# Altium PCB PCB.PcbDoc (part 2 of 2)
Units mm, origin at the board's own origin, x right, y up, seen from the top; angles counter-clockwise.
Board outline 40 x 40 mm, 4 copper layers (Top Layer, Layer 1, Layer 2, Bottom Layer), stack 1.587 mm thick; 76 components, 59 nets, 257 pads, 289 vias.
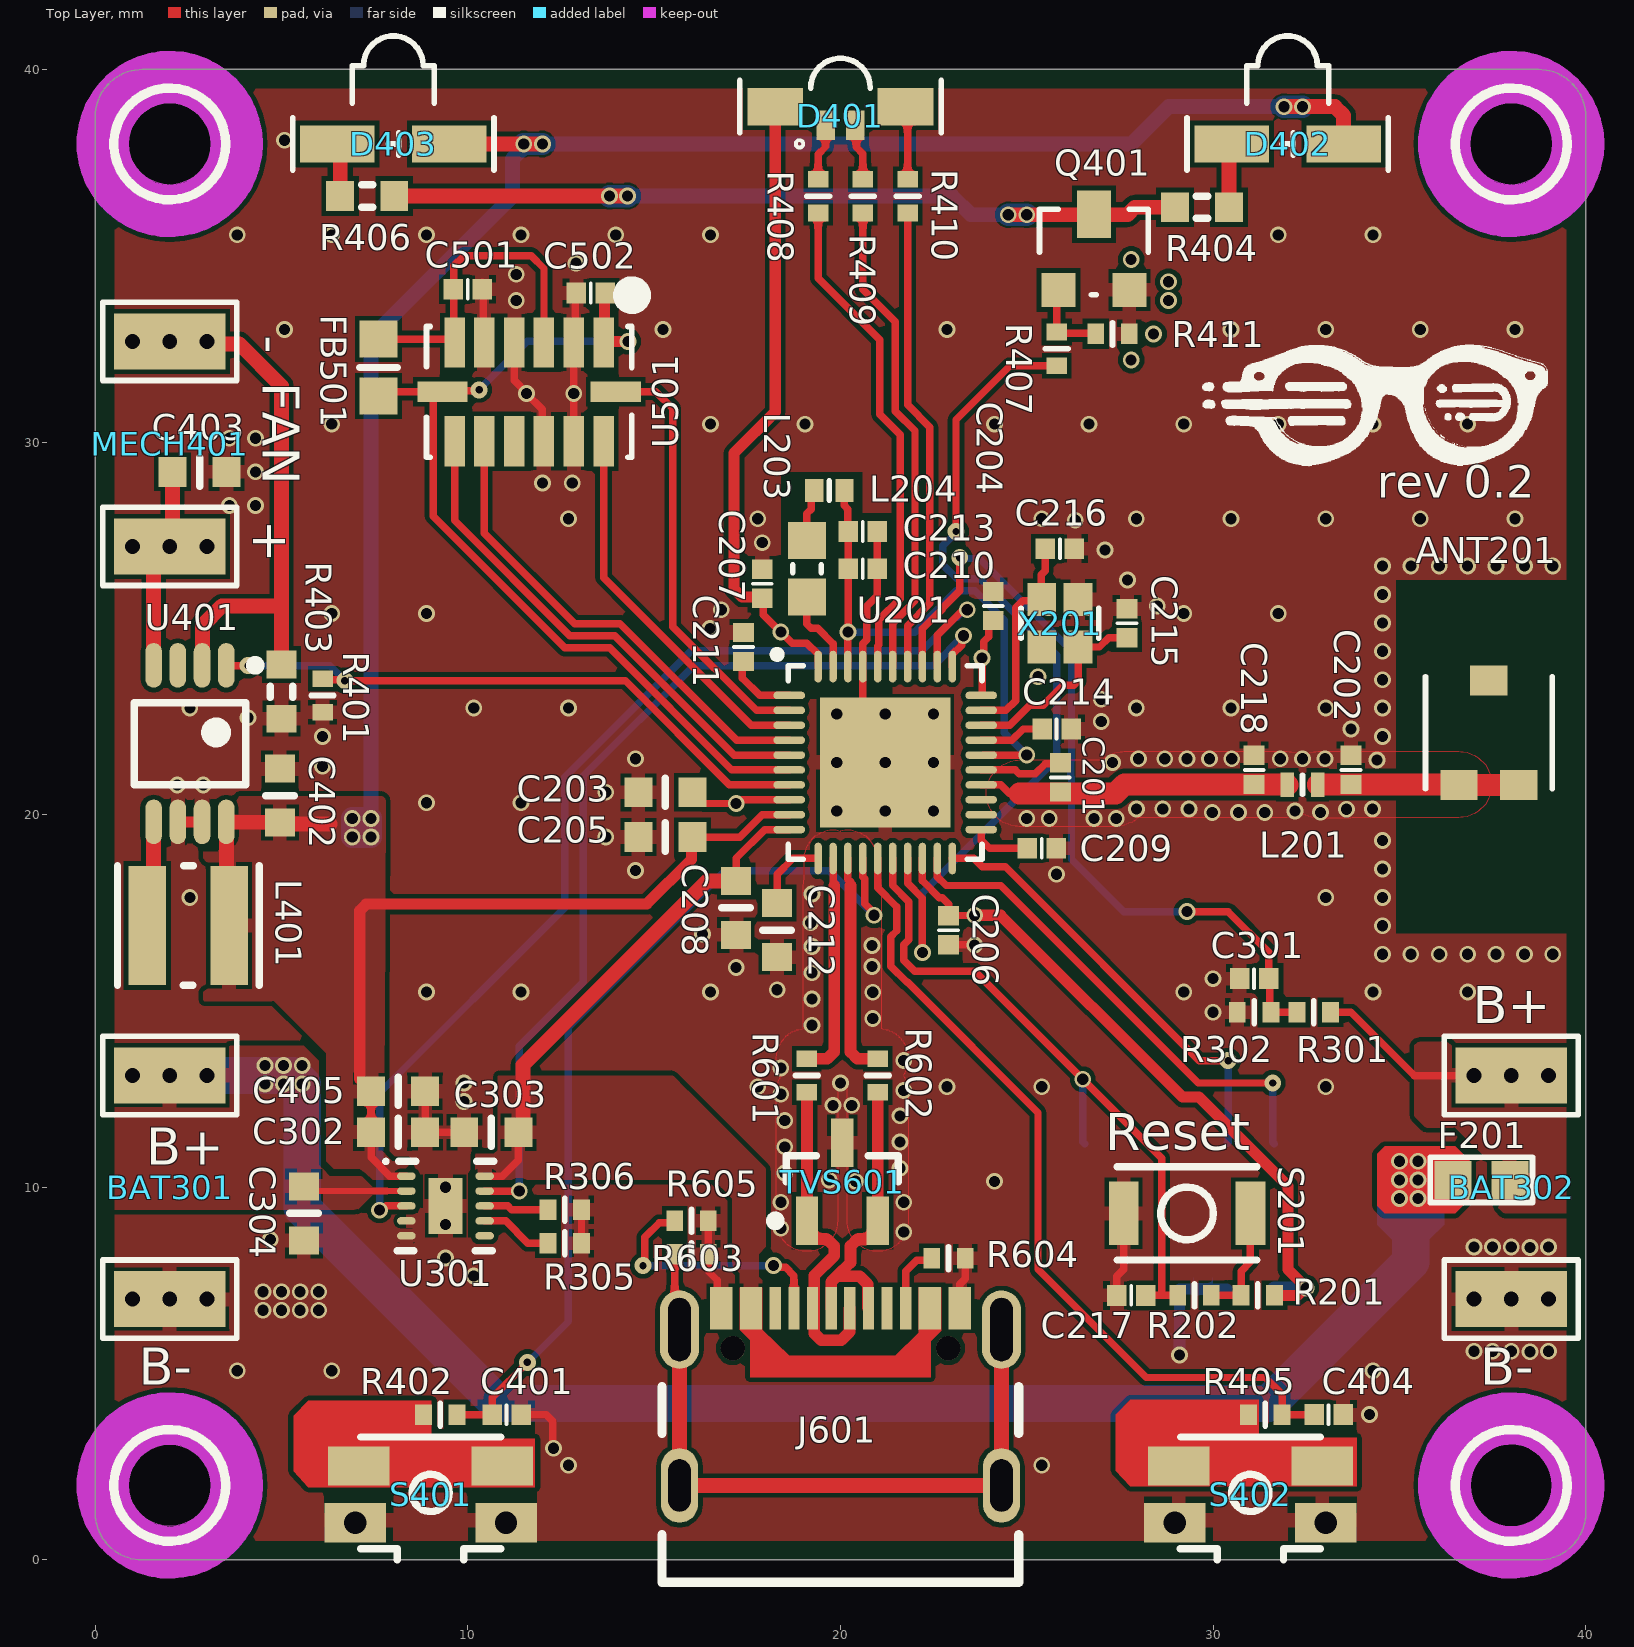
[diagram p0: Top Layer view]

## Via types
v1: diameter 0.45, hole 0.3, Top Layer to Bottom Layer, tented both sides, 133 vias
v2: diameter 0.45, hole 0.3, Top Layer to Bottom Layer, 120 vias
v3: diameter 0.7, hole 0.4, Top Layer to Bottom Layer, tented both sides, 18 vias
v4: diameter 0.45, hole 0.2, Top Layer to Bottom Layer, tented both sides, 9 vias
v5: diameter 0.635, hole 0.3, Top Layer to Bottom Layer, 9 vias

## Nets (pads, with @x,y where several pads share a name; then routed paths per layer and width w, separated by ;. In a path a pad name is that pad's centre, name@x,y a point inside that pad or via, vN(x,y) a via of type N, cw(c..) or ccw(c..) an arc to the next point about the centre after c; other vN are vias at no path point) (continued)
NetC209_1: C209.1 U201.21 | length 1.6
  Top Layer w0.2: U201.21 23.783,19.6 23.783,19.317 24,19.1 C209.1
NetC210_1: C210.1 C213.1 L204.2 U201.26 U201.38 | length 14.9
  Top Layer w0.2: L204.2@20.158,28.647 L204.2 20.1,28.695 20.1,28.3 20.2,28.2 20.2,27.695 20.158,27.652 C213.1 C210.1 20.205,26.595 20.205,24.905 v1(20.2,24.9) U201.38 ; U201.26@23.832,21.6 v1(25,21.6)
  Bottom Layer w0.2: v1(20.2,24.9) 21.996,24.9 23.1,26.004 23.609,26.004 24.4,25.213 24.4,22.2 v1(25,21.6)
NetC211_1: C211.1 U201.1 | length 1.9
  Top Layer w0.2: C211.1 17.361,24.071 17.361,23.667 17.829,23.2 U201.1
NetC212_1: C212.1 U201.11 | length 2.1
  Top Layer w0.2: C212.1 18.3,18.4 18.725,18.825 U201.11
NetC214_1: C214.1 U201.27 | length 1.8
  Top Layer w0.2: U201.27 24.6,22 24.9,22.3 C214.1
NetC215_1: C215.1 U201.28 X201.3 | length 5.4
  Top Layer w0.2: U201.28 24.538,22.4 25.075,22.938 25.438,22.938 25.975,23.475 26.258,23.475 26.375,23.592 X201.3 26.95,24.5 27.197,24.747 C215.1
NetC216_1: C216.1 U201.29 X201.1 | length 5.7
  Top Layer w0.2: U201.29 24.438,22.8 24.7,23.062 24.7,25.55 24.887,25.737 25.362,25.737 X201.1 25.387,25.787 25.387,26.437 25.498,26.548 C216.1
NetC301_1: C301.1 R301.1 R302.2 U201.33 | length 21.6
  Top Layer w0.2: U201.33 22.2,24.989 22.727,25.516 22.727,25.54 23.2,26.013 v4(23.2,26.9) ; v1(29.3,17.4) 30.4,17.4 31.49,16.31 C301.1 31.52,15.57 31.52,14.73 R302.2 R301.1
  Bottom Layer w0.2: v4(23.2,26.9) 23.225,26.875 23.725,26.875 26.2,24.4 26.2,21.459 26.183,21.442 26.183,21.025 26.2,21.008 26.2,18.8 27.6,17.4 v1(29.3,17.4)
NetC401_1: C401.1 R402.1 U201.14 | length 24.3
  Top Layer w0.2: R402.1 C401.1 10.66,3.908 10.66,4.36 v4(11.6,5.3) ; U201.14 20.6,18.334 20.653,18.281 20.653,17.614 20.9,17.368 v1(20.9,17.3)
  Bottom Layer w0.2: v4(11.6,5.3) 12.7,6.4 12.7,14.3 16.9,18.5 19.7,18.5 v1(20.9,17.3)
NetC403_1: C403.1 MECH401.1 U401.4 | length 5.4
  Top Layer w0.2: MECH401.1@1.568,26.768 v3(2,27.2)
  Top Layer w0.4: U401.4 MECH401.1@1.568,26.768 ; v3(2,27.2) 2.075,27.275 C403.1
  other v3: 1,27.2 3,27.2
NetC404_1: C404.1 R405.1 U201.15 | length 22.3
  Top Layer w0.2: U201.15 21,18.038 21.504,17.534 21.504,16.879 21.349,16.724 21.349,16.283 21.346,16.281 21.346,15.936 21.785,15.498 21.802,15.498 25.3,12 25.3,7.8 28.204,4.896 31.404,4.896 31.85,4.45 R405.1 C404.1
NetC501_1: C501.1 FB501.2 U501.3 U501.6 | length 8.8
  Top Layer w0.2: FB501.2 9.552,32.762 9.626,32.687 9.626,32.762 9.626,34.726 9.904,35.004 11.696,35.004 12.043,34.657 U501.3
NetD401_1: D401.1 R408.2 | length 1.5
  Top Layer w0.2: R408.2 19.4,37.719 19.598,37.917 19.598,38.498 D401.1
NetD401_2: D401.2 R409.2 | length 1.5
  Top Layer w0.2: D401.2 20.424,38.476 20.424,37.917 20.6,37.742 R409.2
NetD401_3: D401.3 R410.2 | length 2
  Top Layer w0.2: D401.3 21.8,38.95 R410.2
NetD402_1: D402.1 R404.2 | length 1.7
  Top Layer w0.2: D402.1@30.425,37.925 D402.1
  Top Layer w0.4: R404.2 D402.1@30.425,37.925
NetD403_1: D403.1 R406.2 | length 1.4
  Top Layer w0.4: D403.1 6.575,37.925 R406.2
NetJ601_A5: J601.A5 R605.2 | length 6.8
  Top Layer w0.2: v4(14.7,7.9) 14.748,7.948 14.748,8.658 15.142,9.052 15.502,9.052 R605.2 ; v1(18.2,7.9) 18.248,7.852 18.528,7.852 18.75,7.63 J601.A5
  Bottom Layer w0.2: v4(14.7,7.9) v1(18.2,7.9)
NetJ601_B5: J601.B5 R604.2 | length 1.8
  Top Layer w0.2: J601.B5 21.75,7.75 22.042,8.042 22.392,8.042 R604.2
NetJ601_MH: J601.MH R603.2 | length 19.6
  Top Layer w0.2: R603.2 15.55,6.31 J601.MH@15.68,6.18
  Top Layer w0.4: J601.MH@15.68,6.18 15.68,2 24.32,2 J601.MH@24.32,6.18
  Bottom Layer w0.5: J601.MH@15.68,2 J601.MH@15.88,1.8 ; J601.MH@24.12,1.8 J601.MH@24.32,2
NetL203_1: L203.1 U201.39 | length 2.3
  Top Layer w0.2: L203.1 19.1,25.117 19.217,25 19.387,25 19.8,24.587 U201.39
NetL203_2: L203.2 L204.1 | length 1.4
  Top Layer w0.2: L203.2 19.1,28.083 19.217,28.2 19.217,28.622 L204.1
NetL401_2: L401.2 U401.5 | length 2.6
  Top Layer w0.4: L401.2@1.568,17.195 U401.5
NetMECH401_2: MECH401.2 R403.2 U401.2 | length 14.3
  Top Layer w0.4: v3(2,32.7) 2.75,32.7 MECH401.2@2.875,32.575 ; U401.2 2.878,24.017 2.878,25.078 3.4,25.6 5,25.6 ; v3(3,32.7) 3.066,32.634 3.866,32.634 5,31.5 5,25.6 ; R403.2 5,25.6
  other v3: 1,32.7
NetQ401_1: Q401.1 R407.2 R411.2 | length 2.2
  Top Layer w0.2: Q401.1 25.8,34.037 R407.2 25.825,32.925 26.825,32.925 R411.2
NetQ401_3: Q401.3 R404.1 R406.1 | length 22.2
  Top Layer w0.4: R406.1 v1(13.8,36.6) v1(14.286,36.6) ; v1(24.5,36.1) v1(25,36.1) 26.784,36.1 Q401.3 26.816,36.1 27.7,36.1 27.9,36.3 R404.1
  Bottom Layer w0.4: v1(14.286,36.6) 23,36.6 23.5,36.1 v1(24.5,36.1)
  Bottom Layer w0.6: v1(13.8,36.6) v1(14.286,36.6) ; v1(24.5,36.1) v1(25,36.1)
NetR201_2: R201.2 R202.2 S201.1 | length 3.1
  Top Layer w0.2: R202.2 R201.2 30.75,7.75 31,8 S201.1
NetR305_2: R305.2 U301.7 | length 1.9
  Top Layer w0.2: U301.7 11.012,9.1 11.612,8.5 R305.2
NetR306_2: R306.2 U301.8 | length 1.7
  Top Layer w0.2: U301.8 11.068,9.5 11.172,9.396 11.31,9.396 11.312,9.394 11.688,9.394 11.694,9.4 R306.2
NetR401_1: R401.1 U201.7 U401.1 | length 17.1
  Top Layer w0.2: U401.1 3.525,24 v4(4.1,24) ; R401.1 6.125,23.625 6.675,23.625 v4(6.7,23.6) 14.224,23.6 17.02,20.804 17.746,20.804 17.75,20.8 U201.7
  Bottom Layer w0.2: v4(4.1,24) 6.3,24 v4(6.7,23.6)
NetR402_2: R402.2 S401.1
NetR405_2: R405.2 S402.1
NetR407_1: R407.1 U201.17 | length 23.6
  Top Layer w0.2: U201.17 21.8,18.162 22.2,17.762 v1(22.2,16.3) ; v4(23.1,27.6) 23.1,30.6 24.55,32.05 R407.1
  Bottom Layer w0.2: v1(22.2,16.3) 22.2,17.9 25.8,21.5 25.8,23.487 25.804,23.491 25.804,23.909 25.8,23.913 25.8,24.275 23.744,26.331 23.127,26.331 22.746,26.712 22.746,27.212 23.1,27.566 v4(23.1,27.6)
NetU201_4: U201.4 U501.9 | length 12.9
  Top Layer w0.2: U501.9 10.443,27.557 12.872,25.128 14.083,25.128 17.212,22 U201.4
NetU201_5: U201.5 U501.8 | length 13.7
  Top Layer w0.2: U501.8 9.643,27.895 12.736,24.801 13.948,24.801 17.149,21.6 U201.5
NetU201_31: U201.31 U301.9 | length 25.5
  Top Layer w0.2: U301.9 v1(11.38,9.9) ; U201.31 23,24.3 23.252,24.552 23.252,24.752 v1(23.3,24.8)
  Bottom Layer w0.2: v1(11.38,9.9) 11.38,13.78 13.1,15.5 13.1,21.038 16.062,24 22.5,24 v1(23.3,24.8)
NetU201_32: U201.32 U301.3 | length 29
  Top Layer w0.2: v1(7.63,9.387) 7.698,9.387 7.81,9.5 U301.3 ; U201.32 22.6,24.813 23.239,25.452 23.352,25.452 v1(23.4,25.5)
  Bottom Layer w0.2: v1(7.63,9.387) 7.63,12.53 12.6,17.5 12.6,21 16,24.4 18.187,24.4 18.191,24.396 20.409,24.396 20.413,24.4 22.187,24.4 23.091,25.304 23.136,25.304 23.332,25.5 v1(23.4,25.5)
nRESET: C217.1 P201.10 R202.1 U201.16 | length 18.4
  Top Layer w0.2: U201.16 21.4,18.1 21.831,17.669 21.831,16.644 21.696,16.509 21.696,16.091 21.991,15.796 23.604,15.796 v1(26.5,12.9) 28.62,10.78 28.62,7.1 ; C217.1 28.62,7.1 ; R202.1 28.62,7.1
  Bottom Layer w0.2: v1(26.5,12.9) 26.5,11.228 P201.10
SWDCLK: P201.4 U201.20 | length 11.9
  Top Layer w0.2: U201.20 23.575,18.825 23.8,18.6 24.429,18.6 29.629,13.4 v4(30.4,13.4)
  Bottom Layer w0.2: P201.4 30.4,11.198 v4(30.4,13.4)
SWDIO: P201.2 U201.19 | length 13.4
  Top Layer w0.2: U201.19 22.6,18.334 22.834,18.1 24.3,18.1 29.6,12.8 v4(31.6,12.8)
  Bottom Layer w0.2: v4(31.6,12.8) 31.6,11.208 P201.2
USB.D_+: R602.2 U201.13 | length 6
  Top Layer w0.2: U201.13 20.2,18.272 20.27,18.202 20.27,18.1
  Top Layer w0.313: 20.27,18.1 20.27,13.633 20.453,13.45 R602.2
USB.D_-: R601.2 U201.12 | length 6
  Top Layer w0.2: U201.12 19.8,18.13 19.83,18.1
  Top Layer w0.313: R601.2 19.647,13.45 19.83,13.633 19.83,18.1
USB_D_+: J601.A6 J601.B6 R602.1 TVS601.2 | length 8.1
  Top Layer w0.313: J601.A6 19.75,7.461 19.902,7.614 ; J601.B6@20.732,6.773 20.732,7.399 20.517,7.614 19.902,7.614 ; R602.1 TVS601.2 21,8.75 20.857,8.607 20.453,8.607 20.27,8.423 20.27,7.981 19.902,7.614
USB_D_-: J601.A7 J601.B7 R601.1 TVS601.1 | length 9
  Top Layer w0.313: R601.1 TVS601.1 19.1,8.75 19.243,8.607 19.647,8.607 19.83,8.423 19.83,8.164 19.3,7.634 19.3,6.079 19.483,5.896 20.017,5.896 20.243,6.122 20.243,6.748 J601.A7
VBAT: BAT302.1 F201.2 R301.2 | length 4.6
  Top Layer w0.2: R301.2 33.7,14.7 35.4,13 v3(37,13)
  other v3: 38,13 39,13
VDD_ADXL: C502.1 FB501.1 U201.6 U501.1 U501.7 | length 25.1
  Top Layer w0.2: FB501.1 7.708,31.346 U501.7@9.243,31.346 ; v4(10.3,31.4) 10.273,31.373 9.345,31.373 U501.7 U501.7@9.243,31.346 ; U501.1 U501.1@13.667,32.694 ; C502.1@13.667,33.977 C502.1 ; U201.6 17.087,21.2 13.812,24.474 12.601,24.474 9.068,28.007 9.068,31.171 U501.7@9.243,31.346
  Top Layer w0.3: U501.1 13.672,32.7 v1(14.3,32.7) ; U501.1@13.667,32.694 C502.1@13.667,33.977
  Bottom Layer w0.2: v4(10.3,31.4) 11.6,32.7 v1(14.3,32.7)
VDD_nRF: C203.1 C204.1 C206.1 C207.1 D401.4 P201.1 R201.1 U201.8 U201.18 U201.30 U201.40 | length 59.1
  Top Layer w0.2: C203.1 16.025,20.575 16.3,20.3 17.268,20.3 17.368,20.4 U201.8 ; C207.1 17.91,25.8 17.933,25.777 17.933,25.367 18.7,24.6 19.1,24.6 19.4,24.3 U201.40 ; U201.18 22.2,18.225 22.652,17.773 22.727,17.773 22.9,17.6 C206.1 22.905,17.295 23.595,17.295 v1(23.6,17.3) ; U201.30 23.8,23.2 v1(23.8,24.205) 23.848,24.253 23.848,24.648 23.973,24.773 23.973,25.083 C204.1
  Top Layer w0.3: C207.1 17.867,25.843 17.357,25.843 17.142,26.058 17.142,29.7 18.25,30.808 D401.4 ; v1(23.6,17.3) 24.3,17.3 29.177,12.423 29.622,12.423 32.008,10.037 32.008,7.792 v1(32.5,7.3) 32.459,7.3 32.259,7.1 R201.1
  Layer 1 w0.3: v1(23.6,17.3) 22.686,18.214 22.686,18.314 21.8,19.2 18.3,19.2 v1(17.2,20.3) 17.2,23.7 v1(18.4,24.9) 19.095,24.205 v1(23.8,24.205)
  Bottom Layer w0.4: P201.1 32.454,7.268 32.486,7.3 v1(32.5,7.3)
VSYS: C205.1 C302.1 C402.1 C405.1 D402.2 D403.2 L401.1 U201.9 U301.1 U401.8 | length 73.6
  Top Layer w0.2: C302.1 7.404,10.802 7.906,10.3 U301.1 ; C205.1 17.3,19.4 17.9,20 U201.9
  Top Layer w0.3: C405.1 7.404,12.602 7.1,12.906 7.1,17.424 7.276,17.6 14.8,17.6 16,18.8 16,19.375 C205.1
  Top Layer w0.4: L401.1@3.518,17.105 U401.8 ; U401.8@3.529,19.796 C402.1@4.945,19.796 ; C402.1@5.016,19.75 6.3,19.75 ; D403.2 v1(11.5,38) v1(12,38) ; v1(31.9,39) v1(32.4,39) 33.266,39 33.5,38.766 D402.2
  Bottom Layer w0.4: v1(7.4,19.9) 7.4,32.8 11.2,36.6 11.2,37.6 11.6,38 v1(12,38) 27.8,38 28.8,39 v1(31.9,39)
  Bottom Layer w0.6: v1(11.5,38) v1(12,38) ; v1(31.9,39) v1(32.4,39) ; v1(6.9,19.4) v1(7.4,19.4) v1(7.4,19.9) v1(6.9,19.9) v1(6.9,19.4)
pads on no net: ANT201.3 J601.A8 J601.B8 J601.DNC P201.6 P201.7 P201.8 P201.9 U201.22 U201.23 U301.6 U401.3 U501.10
copper on no net:
  other v1: 27.8,32.2 28.4,32.9 28.8,33.8 28.8,34.3 27.8,34.9

## Polygon pours and split planes (outlines as drawn)
GND on Layer 2 "GND_L03_P027" (solid, pour order 27): 21.1,19.3 21.1,15.5 21.1,14.2 21.9,14.2 21.9,8.4 21.1,7.6 21.1,5.7 18.9,5.7 18.9,7.7 18.2,8.4 18.2,14.2 19,14.2 19,14.7 19,19.3
GND on Layer 2 "GND_L03_P003" (solid, pour order 3): 1.27,0 cw(c1.27,1.27) 0,1.27 0,38.73 cw(c1.27,38.73) 1.27,40 38.73,40 cw(c38.73,38.73) 40,38.73 40,1.27 cw(c38.73,1.27) 38.73,0
GND on Top Layer (solid, pour order 34): 36.647,21.693 36.706,21.693 36.821,21.67 37.035,21.581 37.132,21.516 37.296,21.352 37.361,21.255 37.398,21.166 37.45,21.041 37.473,20.926 37.473,20.694 37.45,20.579 37.361,20.365 37.296,20.268 37.132,20.104 37.035,20.039 36.946,20.002 36.821,19.95 36.706,19.927 36.647,19.927 36.59,19.916 33.72,19.916 33.695,19.911 32.815,19.911 32.758,19.922 32.699,19.922 32.584,19.945 32.391,20.025 32.336,20.002 32.211,19.95 32.096,19.927 32.037,19.927 31.98,19.916 27.976,19.916 27.966,19.909 27.924,19.868 27.827,19.803 27.738,19.766 27.613,19.714 27.498,19.691 27.439,19.691 27.382,19.68 24.8,19.68 24.743,19.691 24.684,19.691 24.569,19.714 24.355,19.803 24.258,19.868 24.094,20.032 24.029,20.129 23.992,20.218 23.94,20.343 23.917,20.458 23.917,20.69 23.94,20.805 24.029,21.019 24.094,21.116 24.258,21.28 24.355,21.345 24.444,21.382 24.569,21.434 24.684,21.457 24.743,21.457 24.8,21.468 27.024,21.468 27.034,21.475 27.076,21.516 27.173,21.581 27.262,21.618 27.387,21.67 27.502,21.693 27.561,21.693 27.618,21.704 31.98,21.704 32.037,21.693 32.096,21.693 32.211,21.67 32.404,21.59 32.459,21.613 32.584,21.665 32.699,21.688 32.758,21.688 32.815,21.699 33.675,21.699 33.7,21.704 36.59,21.704
NetBAT301_1 on Top Layer "NETBAT301_1_L01_P013" (solid, pour order 13): 6.3,10.3 6,10.6 6,13.4 5.6,13.8 0.45,13.8 0.45,9.4 2.65,9.4 7.05,9.4 7.45,9.8 7.85,9.8 7.85,10 7.45,10 7.15,10.3
VSYS on Top Layer "VSYS_L01_P014" (solid, pour order 14): 4.8,15 2.9,15 2.9,19 3.3,19 3.3,20.5 7.797,20.5 7.75,10.925 7.975,10.7 8.627,10.7 8.627,10.2 7.4,10.2 7.1,10.5 6.4,10.5 6.2,10.7 6.2,13.6
GND on Top Layer "Top Layer-GND 1" (solid, pour order 29): 295 vertices, not listed, extent 18.276,8.278 21.824,19.592
VBAT on Top Layer "VBAT_L01_P017" (solid, pour order 17): 36.5,11.6 35.7,11.6 35.4,11.9 35.4,13.9 40,13.9 40,9.3 37.8,9.3 37.4,9.7 37.4,10.7
GND on Top Layer "GND_L01_P016" (solid, pour order 16): 8.7,9.3 2,9.3 0.4,9.3 0.4,6.2 13.8,6.2 13.8,10 12.8,10 12.8,8 10.1,8 10,8.1 10,10.7 10.5,11.2 10.5,13 8.2,13 8.2,11.22 8.8,10.74 8.8,9.4
GND on Top Layer "GND_L01_P033" (solid, pour order 33): 1.27,0 cw(c1.27,1.27) 0,1.27 0,38.73 cw(c1.27,38.73) 1.27,40 38.73,40 cw(c38.73,38.73) 40,38.73 40,1.27 cw(c38.73,1.27) 38.73,0
5V_USB on Top Layer "5V_USB_L01_P015" (solid, pour order 15): 17.3,6.175 17.9,6.18 17.9,7.5 17.8,7.6 17.8,8.2 18,8.4 18,10.5 15.5,13 10.8,13 10.8,11 10.7,10.9 10.2,10.9 10.2,10.2 16.6,10.2 17.1,9.7 17.1,7.9 17.3,7.7
GND on Bottom Layer "GND_L04_P018" (solid, pour order 18): 1.27,0 cw(c1.27,1.27) 0,1.27 0,38.73 cw(c1.27,38.73) 1.27,40 38.73,40 cw(c38.73,38.73) 40,38.73 40,1.27 cw(c38.73,1.27) 38.73,0
GND on Layer 1 "GND_L02_P022" (solid, pour order 22): 1.27,0 cw(c1.27,1.27) 0,1.27 0,38.73 cw(c1.27,38.73) 1.27,40 38.73,40 cw(c38.73,38.73) 40,38.73 40,1.27 cw(c38.73,1.27) 38.73,0

## Keep-outs
Keep-Out Layer:
  circle w1.4: c38,2 r1.8
  circle w1.4: c38,38 r1.8
  circle w1.4: c2,38 r1.8
  circle w1.4: c2,2 r1.8

## Other copper
Top Layer:
  region net NetBAT301_1: 34.6,11.1 36.5,11.1 36.9,10.7 36.9,9.7 36.5,9.3 34.6,9.3 34.4,9.5 34.4,10.9
  pour cut-out: 18.4,29.2 20.6,29.2 20.6,28.5 20.6,28.102 21.4,28.102 21.4,23.1 21.3,23.1 21.224,23.1 18.4,23.1
  pour cut-out: 39.85,16.8 34.9,16.8 34.9,26.3 39.85,26.3
  region net NetR405_2: 27.781,1.973 27.381,2.4 27.381,3.9 27.781,4.3 31.219,4.3 31.219,3.299 33.858,3.277 33.858,1.973
  region net NetR402_2: 5.723,1.948 5.323,2.375 5.323,3.875 5.723,4.275 9.023,4.275 9.023,3.275 11.8,3.252 11.8,1.948
  region net 5V_USB: 22.7,7.3 22.7,6.15 22.425,5.875 22.425,4.9 17.575,4.9 17.575,5.475 17.575,5.9 17.3,6.175 17.3,7.3 17.9,7.3 17.9,6.175 18.625,5.475 21.475,5.475 22.1,6.1 22.1,7.3
Layer 1:
  pour cut-out: 34.9,22 34.9,19.7 23.6,19.7 23.6,22
  pour cut-out: 20.6,15.3 20.6,13.9 21.5,13.9 21.5,8 21.1,7.6 21.1,5.7 18.9,5.7 18.9,7.7 18.6,8 18.6,13.9 19.4,13.9 19.4,14.9 19.4,18.967 20.6,18.967
  pour cut-out: 39.85,16.8 34.9,16.8 34.9,26.3 39.85,26.3
Layer 2:
  pour cut-out: 39.85,16.8 34.9,16.8 34.9,26.3 39.85,26.3
Bottom Layer:
  region net NetBAT301_1: 36.2,10.9 36.2,9 35.8,8.6 34.8,8.6 34.4,9 34.4,10.9 34.6,11.1 36,11.1
  pour cut-out: 39.85,16.8 34.9,16.8 34.9,26.3 39.85,26.3

## Silkscreen, mask and mechanical layers (free items; w line width, h text height)
Top Overlay:
  drawing of 28 lines, arcs and shapes, not listed
  text "rev 0.2" at 34.4,28.216 h1.5
  text "Reset" at 27.1,11 h1
Bottom Overlay:
  lines w0.152: 2,1 2,1
  text "SWDCLK" at 30.65,17.415 h0.7 r90
  text "nReset" at 26.85,16.982 h0.7 r90
  text "SWDIO" at 31.95,16.499 h0.7 r90
  text "SWD connector" at 23.7,13.365 h1 r90
  text "GND" at 29.45,5.15 h0.7 r90
  text "GND" at 30.65,5.15 h0.7 r90
  text "VDD" at 31.95,5.15 h0.7 r90
Top Solder:
  lines w0.7: 24.818,20.6 26.318,20.6 ; 35.238,20.827 36.738,20.827
Mechanical 1:
  circle w0.127: c2,2 r1.1
  circle w0.127: c38,2 r1.1
  circle w0.127: c2,38 r1.1
  circle w0.127: c38,38 r1.1
  lines w0.254: 0,1.27 ccw(c1.27,1.27) 1.27,0 38.73,0 ccw(c38.73,1.27) 40,1.27 40,38.73 ccw(c38.73,38.73) 38.73,40 1.27,40 ccw(c1.27,38.73) 0,38.73 0,1.27

## Text inside footprints (layer, text, board x,y; h text height)
BAT301: Top Overlay "B+" at 1.367,10.6 h1; Top Overlay "B-" at 1.167,4.7 h1
BAT302: Top Overlay "B+" at 36.967,14.4 h1; Top Overlay "B-" at 37.167,4.7 h1
MECH401: Top Overlay "FAN" at 4.5,31.6 h1 r270; Top Overlay "+" at 5.1,26.767 h1 r90; Top Overlay "-" at 5,32.367 h1 r90